# Altium PCB PCB2.PcbDoc
Units mm, origin at the board's own origin, x right, y up, seen from the top; angles counter-clockwise.
Board outline 98 x 98 mm, 2 copper layers (Top Layer, Bottom Layer); 29 components, 27 nets, 109 pads, 5 vias.
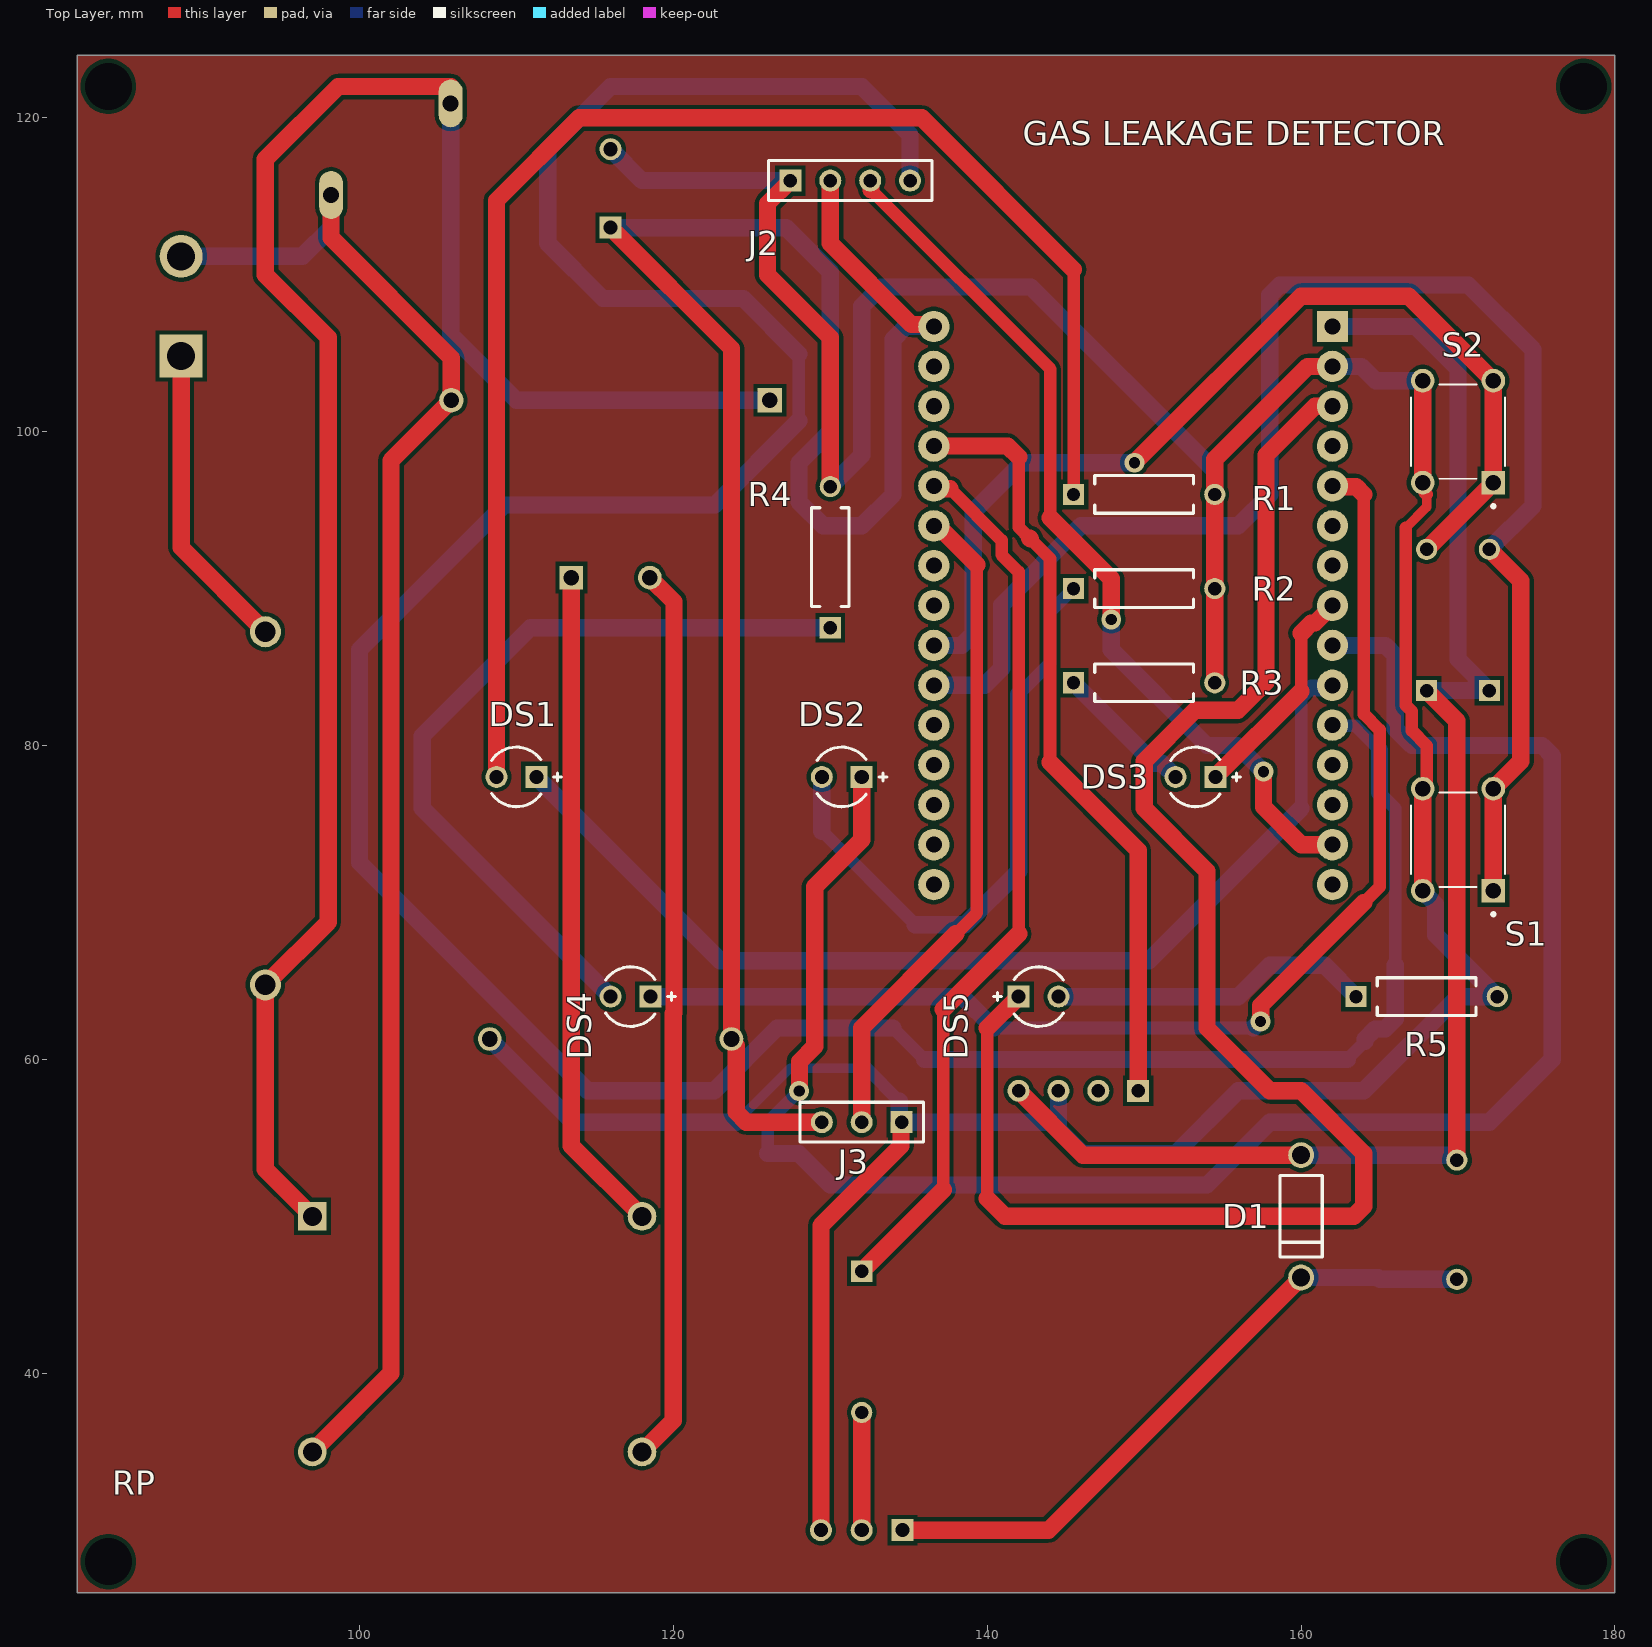
[diagram p0: Top Layer view]
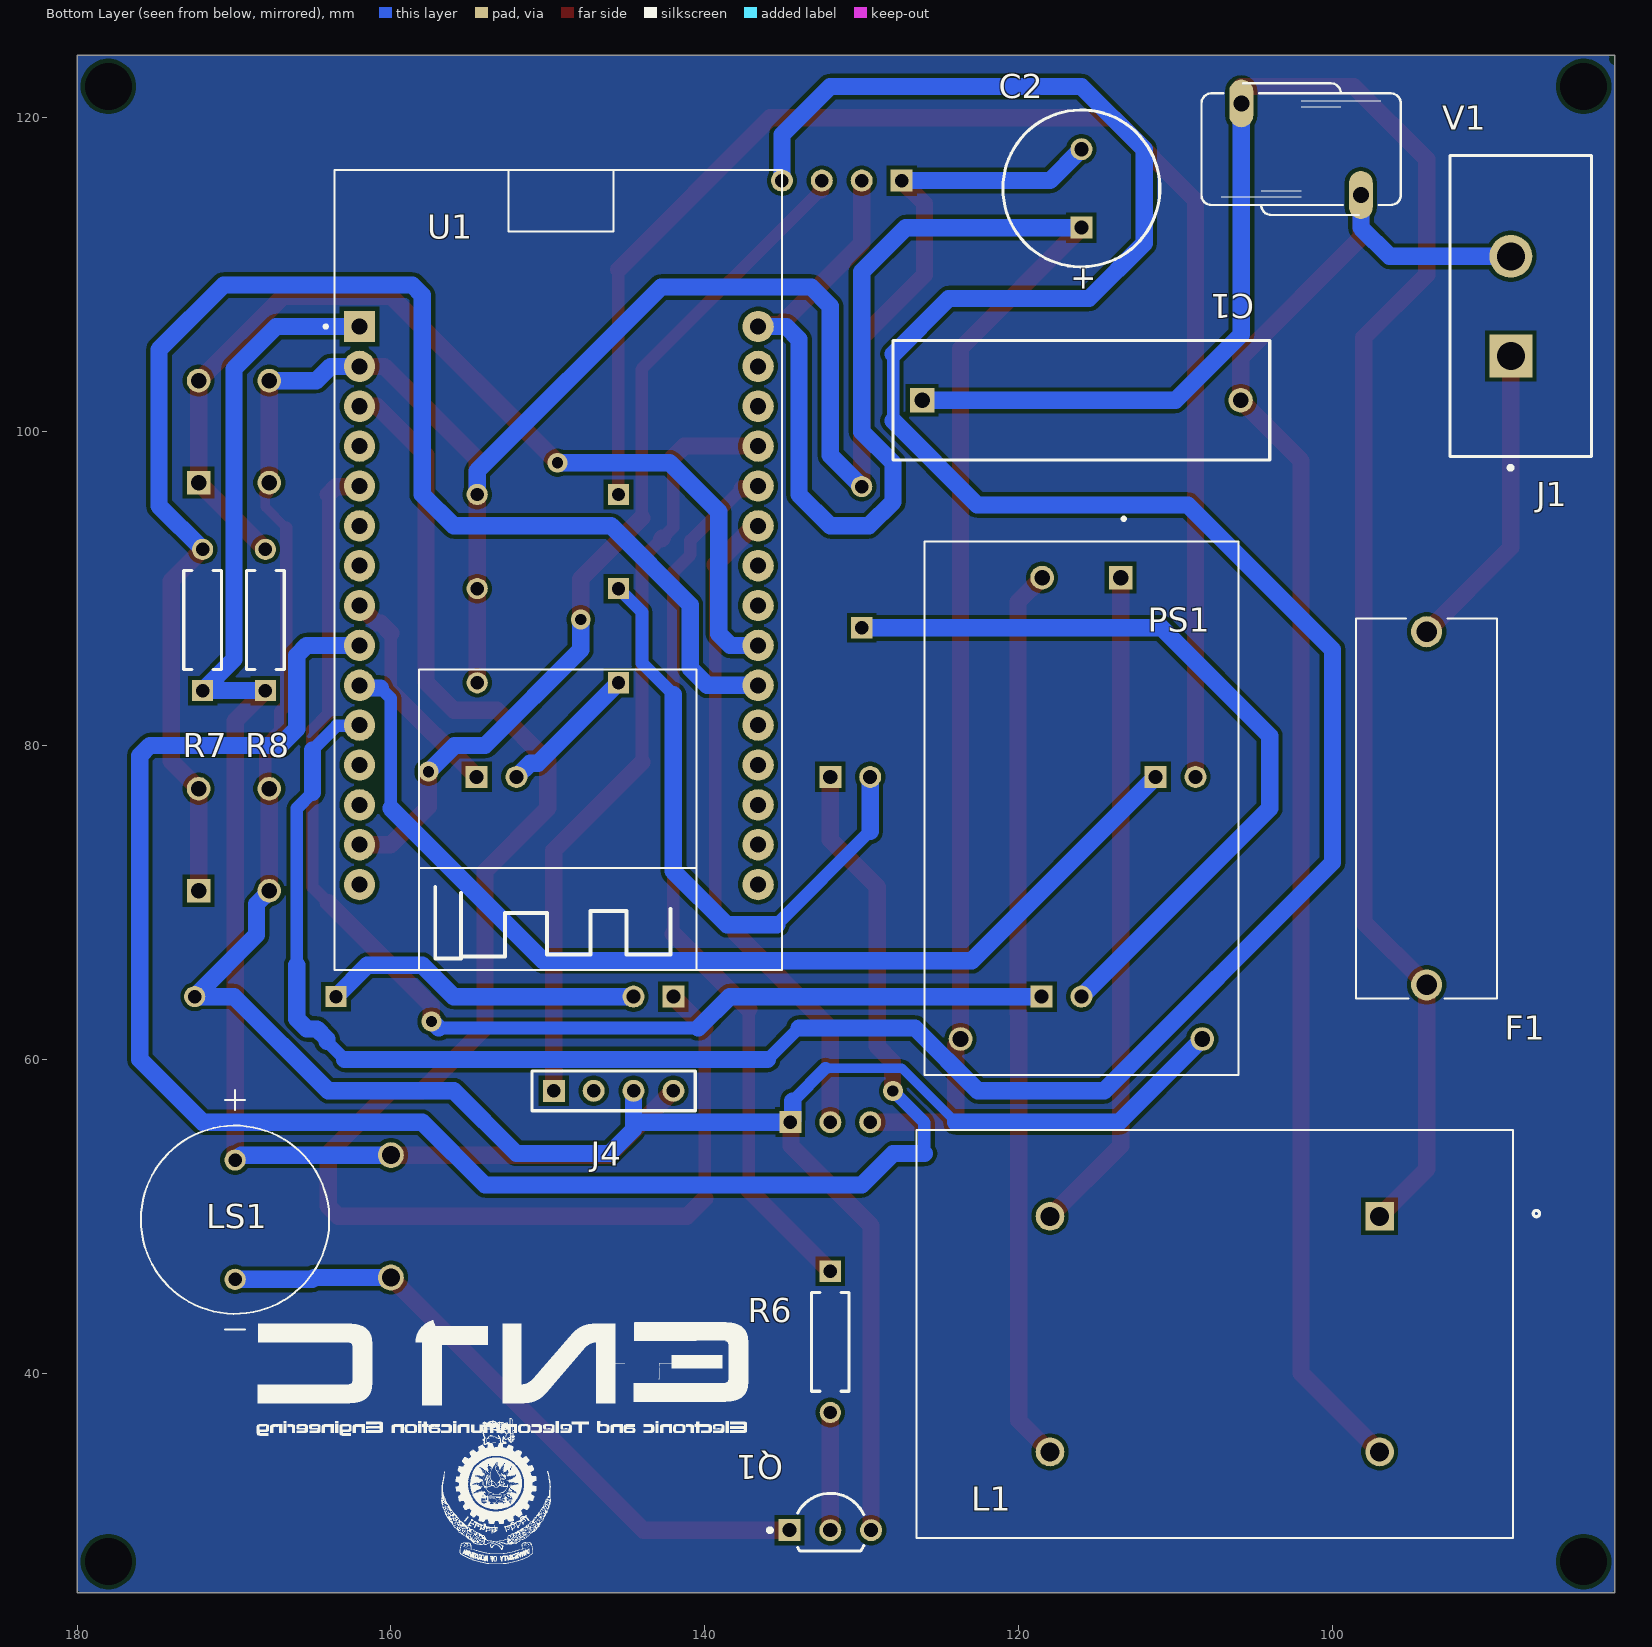
[diagram p1: Bottom Layer view, seen from below]
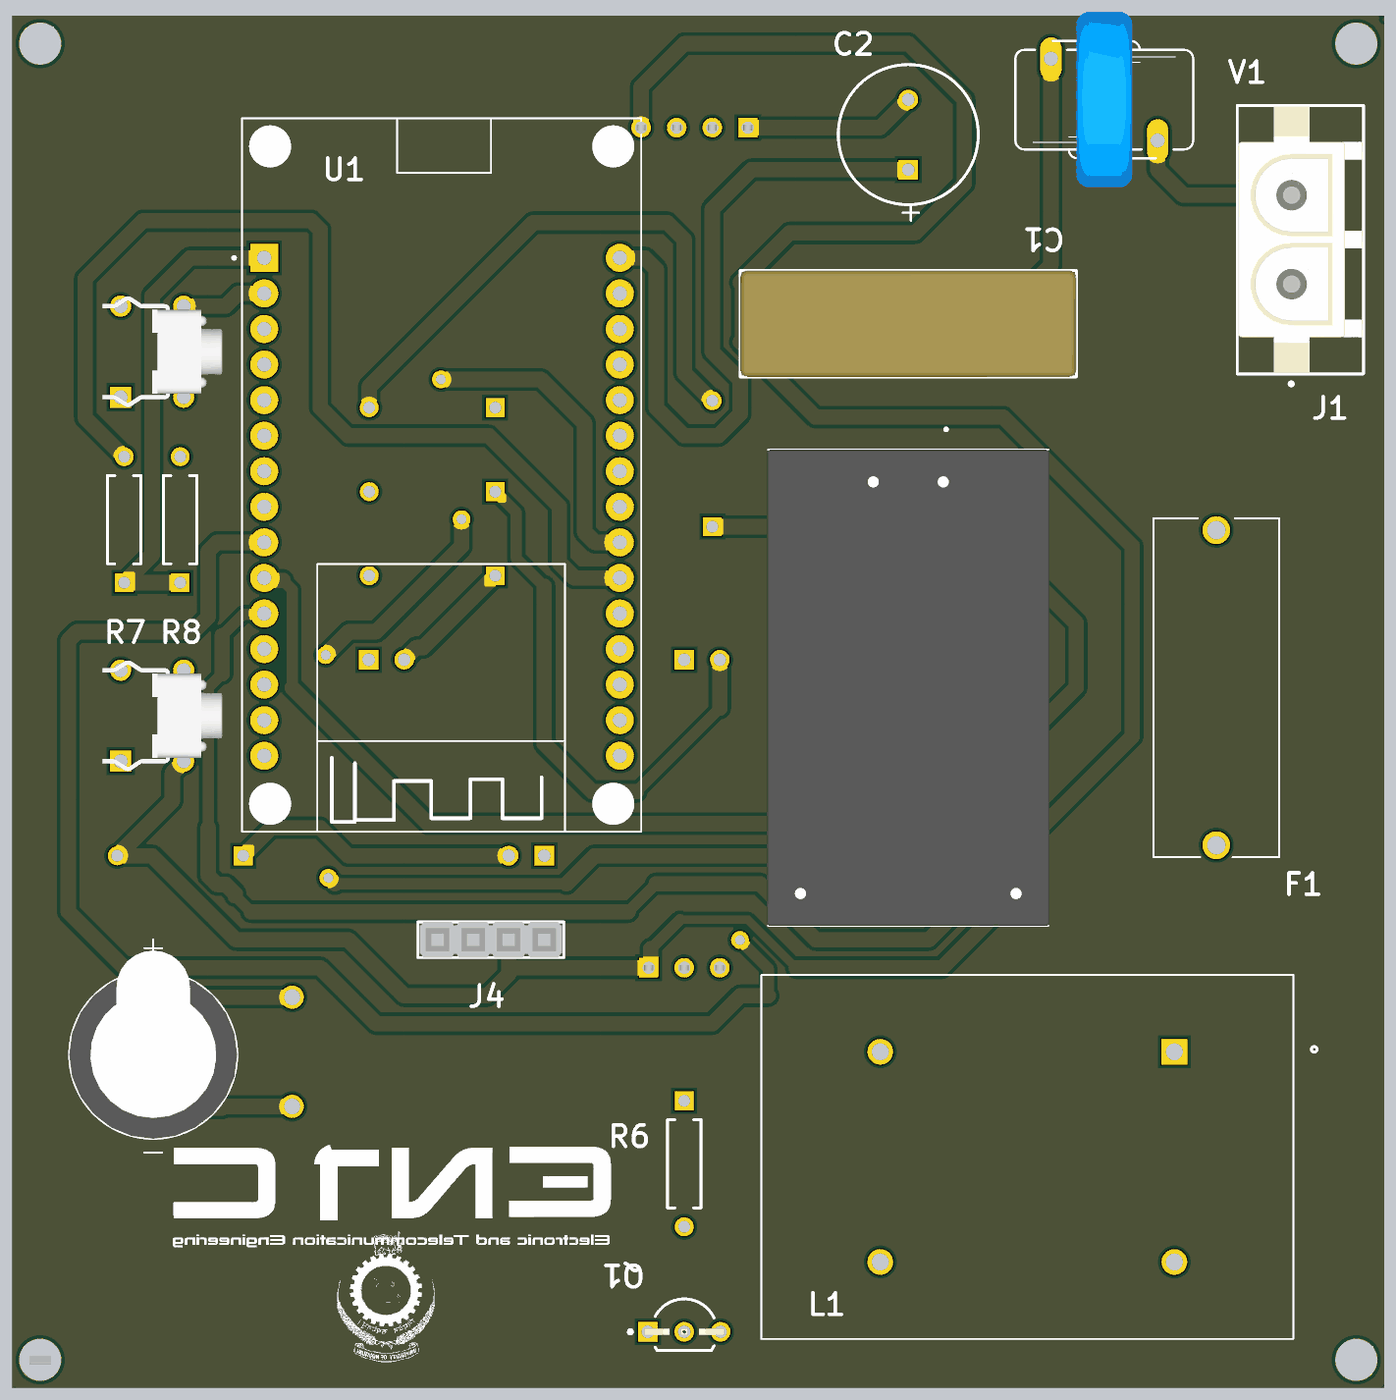
[diagram p2: 3D render of the assembled board from below, using the file's embedded part models]

## Layer stack, top to bottom
Top Solder: solder mask 0.0102, Solder Resist, Dk 3.5
Top Layer: signal copper 0.0356
Dielectric 1: dielectric 0.32, FR-4, Dk 4.8
Bottom Layer: signal copper 0.0356
Bottom Solder: solder mask 0.0102, Solder Resist, Dk 3.5

## Board outline
82,26 180,26 180,124 82,124

## Design rules (kind name [scope] priority, off if disabled: settings)
Clearance [All] p1: gap=0.254 ignorepadtopadclearanceinfootprint=FALSE except(0: Arc-Hole Track-Hole SMDPad-Hole THPad-Hole Via-Hole Fill-Hole Poly-Hole Region-Hole Text-Hole)
PolygonConnect [All] p1: connectstyle=Relief reliefconductorwidth=0.254 reliefentries=4 polygonreliefangle="90 Angle" airgapwidth=0.254
RoutingVias [All] p1: holewidth=0.711 width=1.27 viastyle="Through Hole" minholewidth=0.711 minwidth=1.27 maxholewidth=0.711 maxwidth=1.27
SolderMaskExpansion [All] p1: expansion=0.102 istentingtop=FALSE
Width [All] p1: maxlimit=1.3 minlimit=0.8 preferedwidth=1.1 minimp=50.000000 maximp=50.000000 favimp=50.000000
30 further rules are at their usual default settings.

## Classes and differential pairs
component class Sheet1: C1 C2 D1 DS1 DS2 DS3 DS4 DS5 F1 J4 L1 LS1 PS1 Q1 R1 R2 R3 R4 R5 R6 R7 R8 S1 S2 U1 V1

## Components (designator, comment, footprint, x,y, rotation, side; value= is the part's Value field where it differs from the comment)
C1 "0.1µF/275V" FP-PMR209MC6100M100R30-MFG 116,102 r180 bottom
C2 "ECA-1HM221" CAPPR65-500-1250X1000X1350 116,115.5 r90 bottom value=220µF
D1 "1N4001" FAIR-DO-41-2 160,50 r270 top
DS1 "LTL-1CHE_G" INDPR60-254-520X380X650 110,78 r180 top
DS2 "LTL-1CHE_Y" INDPR60-254-520X380X650 130.73,78 r180 top
DS3 "LTL-1CHE_R" INDPR60-254-520X380X650 153.27,78 r180 top
DS4 "LTL-1CHE_B" INDPR60-254-520X380X650 117.27,64 r180 top
DS5 "LTL-1CHE_B" INDPR60-254-520X380X650 143.27,64 r0 top
F1 "500mA" FUSE_4628 94,76 r270 bottom
J1 "350428-1" FP-350428-1-MFG 88,108 r90 bottom
J2 "OLED display" SMTC-SLW-104-01-X-S 127.46,116 r0 top
J3 "Header 3 pin" SMTC-SLW-103-01-X-S 134.54,56 r180 top
J4 "MQ-6 GAS sensor input" SMTC-SLW-104-01-X-S 149.62,58 r180 bottom
L1 "ET3542-055" IND_ET3542-055 107.497,42.494 r180 bottom
LS1 "AI-1223-TWT-5V-R" XDCR_AI-1223-TWT-5V-R 169.926,49.784 r180 bottom
PS1 "HLK-PM01" CONV_HLK-PM01 116,76 r270 bottom
Q1 "BC547" ONSC-TO-92-3-29-11_AM_BL 132,30 r180 bottom
R1 "MFR-25FBF52-1K" RESA60-630X240 150,96 r0 top value=100Ω
R2 "MFR-25FBF52-1K" RESA60-630X240 150,90 r0 top value=100Ω
R3 "MFR-25FBF52-1K" RESA60-630X240 150,84 r0 top value=100Ω
R4 "MFR-25FBF52-1K" RESA60-630X240 130,92 r90 top value=100Ω
R5 "MFR-25FBF52-1K" RESA60-630X240 168,64 r0 top value=100Ω
R6 "MFR-25FBF52-1K" RESA60-630X240 132,42 r270 bottom value=220Ω
R7 "MFR-25FBF52-1K" RESA60-630X240 172,88 r90 bottom value=5kΩ
R8 "MFR-25FBF52-1K" RESA60-630X240 168,88 r90 bottom value=5kΩ
S1 "TL1105AF160Q" SW_TL1105AF160Q 170,74 r90 top
S2 "TL1105AF160Q" SW_TL1105AF160Q 170,100 r90 top
U1 "ESP32-DEVKIT-V1" MODULE_ESP32_DEVKIT_V1 149.3,91.185 r180 bottom
V1 "MOV-10D561K" MOV-10D561 102,118 r270 bottom

## Footprints (in the part's own frame and the unit in brackets; to place one, negate y for a bottom-side part, rotate by r counter-clockwise, add the part's x,y. Pads: shape width x height; smd on the part's side, far side on the other; paste and mask are expansions set on the pad)
CAPPR65-500-1250X1000X1350 [mm] "THD, 2-Leads, Dia 10mm, Body Length 12.5mm"
  rect 1.4x1.4 hole 0.9: 1(-2.5,0)
  round 1.4 hole 0.9: 2(2.5,0)
  silkscreen extent -5,-5 5,5, body extent -5,-5 4.95,5, height 13.5
CONV_HLK-PM01 [mm]
  rect 1.508x1.508 / inner round 1.508 / far side rect 1.508x1.508 hole 1: 1(-14.7,2.5)
  round 1.508 hole 1: 2(-14.7,-2.5) 3(14.7,7.7) 4(14.7,-7.7)
  silkscreen extent -18.55,-10 17,10, body extent -17,-10.1 17,10.1, height 15
FAIR-DO-41-2 [mm] "THD, 2-Leads, Body 5.2x2.72mm, Pin Spacing 7.8mm"
  round 1.65 hole 1.15: 1(-3.9,0) 2(3.9,0)
  silkscreen extent -2.6,-1.35 2.6,1.35, body extent -4.29,-1.17 4.29,1.17, height 2.35
FP-350428-1-MFG [mm]
  rect 2.73x2.73 hole 1.78 paste-1000 mask+0: 1(-3.175,0.635)
  round 2.73 hole 1.78 paste-1000 mask+0: 2(3.175,0.635)
  silkscreen extent -10.42,-4.51 9.59,4.51, body extent -9.53,-4.46 9.53,4.43, height 15.08
FP-PMR209MC6100M100R30-MFG [mm]
  rect 1.55x1.55 hole 1 paste-1000 mask+0: 1(-10.15,0)
  round 1.55 hole 1 paste-1000 mask+0: 2(10.15,0)
  silkscreen extent -12,-3.8 12,3.8, body extent -12,-3.8 12,3.8, height 14
FUSE_4628 [mm]
  round 1.98 hole 1.32: 1(-11.25,0) 2(11.25,0)
  silkscreen extent -12.1,-4.5 12.1,4.5
IND_ET3542-055 [mil]
  rect 72x72 hole 48: 1(413.5,295.5)
  round 72 hole 48: 2(413.5,-295.5) 3(-413.5,-295.5) 4(-413.5,295.5)
  silkscreen extent -748,-512 815,512
INDPR60-254-520X380X650 [mm] "THD, 2-Leads, Dia 3.8mm, Pitch 2.54mm"
  rect 1.4x1.4 hole 0.9: 1(-1.27,0)
  round 1.4 hole 0.9: 2(1.27,0)
  silkscreen extent -2.87,-1.9 1.58,1.9, body extent -1.9,-1.9 1.9,1.9, height 6.5
MODULE_ESP32_DEVKIT_V1 [mm]
  rect 2x2 / inner round 2 / far side rect 2x2 hole 1.02: 1(-12.7,15.515)
  round 2 hole 1.02: 2(-12.7,12.975) 3(-12.7,10.435) 4(-12.7,7.895) 5(-12.7,5.355) 6(-12.7,2.815) 7(-12.7,0.275) 8(-12.7,-2.265) 9(-12.7,-4.805) 10(-12.7,-7.345) 11(-12.7,-9.885) 12(-12.7,-12.425) 13(-12.7,-14.965) 14(-12.7,-17.505) 15(-12.7,-20.045) 16(12.7,-20.045) 17(12.7,-17.505) 18(12.7,-14.965) 19(12.7,-12.425) 20(12.7,-9.885) 21(12.7,-7.345) 22(12.7,-4.805) 23(12.7,-2.265) 24(12.7,0.275) 25(12.7,2.815) 26(12.7,5.355) 27(12.7,7.895) 28(12.7,10.435) 29(12.7,12.975) 30(12.7,15.515)
  round 3 on Bottom Overlay: ""(-12.28,-23.475) ""(-12.28,23.475) ""(12.23,-23.475) ""(12.23,23.475)
  silkscreen extent -14.95,-25.47 14.23,25.48
MOV-10D561 [mil]
  oval 120x60 hole 40: 1(-115,-150) 2(115,150)
  silkscreen extent -165,-250 165,250, body extent -246,-79 246,79, height 610
ONSC-TO-92-3-29-11_AM_BL [mm] "TO, 3-Leads, Body Dia 4.7mm, Pitch 2.6mm"
  rect 1.4x1.4 hole 0.9: 1(-2.6,0)
  round 1.4 hole 0.9: 2(0,0) 3(2.6,0)
  silkscreen extent -3.98,-1.34 2.13,2.35, body extent -2.84,-1.34 2.84,2.35, height 5.33
RESA60-630X240 [mm] "Axial Resistor, 2-Leads, Dia 2.4mm, Body Length 6.3mm"
  rect 1.35x1.35 hole 0.85: 1(-4.5,0)
  round 1.35 hole 0.85: 2(4.5,0)
  silkscreen extent -3.15,-1.2 3.15,1.2, body extent -4.77,-1.19 4.77,1.2, height 2.4
SMTC-SLW-103-01-X-S [mm] "Low Profile Socket Strip, 1x3 Pins, Vertical, 2.54mm Pitch, Female"
  rect 1.4x1.4 hole 0.86: 1(0,0)
  round 1.4 hole 0.86: 2(2.54,0) 3(5.08,0)
  silkscreen extent -1.4,-1.27 6.48,1.27, body extent -1.27,-1.27 6.35,1.27, height 4.57
SMTC-SLW-104-01-X-S [mm] "Low Profile Socket Strip, 1x4 Pins, Vertical, 2.54mm Pitch, Female"
  rect 1.4x1.4 hole 0.86: 1(0,0)
  round 1.4 hole 0.86: 2(2.54,0) 3(5.08,0) 4(7.62,0)
  silkscreen extent -1.4,-1.27 9.02,1.27, body extent -1.27,-1.27 8.89,1.27, height 4.57
SW_TL1105AF160Q [mm]
  rect 1.508x1.508 / inner round 1.508 / far side rect 1.508x1.508 hole 1: 1(-3.25,-2.25)
  round 1.508 hole 1: 2(3.25,-2.25) 3(-3.25,2.25) 4(3.25,2.25)
  silkscreen extent -4.85,-3 3,3, body extent -3.95,-3 3.95,3, height 5
XDCR_AI-1223-TWT-5V-R [mm]
  round 1.358 hole 0.85: N(0,-3.8) P(0,3.8)
  silkscreen extent -6,-6.98 6,8.25, body extent -6,-6 6,7.44, height 9.7

## Part data
C1: library part CMP-03022-000018-1, "FILTER RC 100 OHM/0.1UF TH", Capacitance=100nF, Case/Package=Radial, Dielectric Material=Paper, Max Operating Temperature=85°C, Min Operating Temperature=-40°C, Package Quantity=250, Resistance=100R, Resistance Tolerance=30%, Tolerance=20%, Voltage=630V, Voltage Rating=250V, Construction=RADIAL, Depth=7.6mm, Height=14mm, Height - Seated (Max)=0.551inch, Lead Diameter=0.8mm, Lead Pitch=20.3mm, Length=24mm, Mount="Through Hole", Number of Elements=1, Number of Pins=2, Number of Terminals/Pins=2, Packaging=Bulk, Pitch=20.3mm, Radiation Hardening=No, REACH SVHC="No SVHC", RoHS Compliant=Yes, Series=PMR209, Series Resistance=100R, Terminal Pitch=20.3mm, Termination=Radial, Voltage Rating (AC)=250V, Width=7.6mm
C2: library part CMP-001-00028-7, "Aluminum Electrolytic Capacitor, 220 uF, +/- 20%, 50 V, -40 to 85 degC, 2-Pin THD, RoHS, Bulk", Capacitor Type=Electrolytic, Case/Package=Radial, Manufacturer=Panasonic, Max Operating Temperature=85°C, Min Operating Temperature=-40°C, Package Description="2-Pin Radial Lead, Dia 10 mm, Body Length 12.5 mm", Package Quantity=200, Package Reference=CAPPR65-500-1250X1000X1350, Ripple Current=400mA, Tolerance=20%, Voltage Rating=50V, Datasheet URL=http://industrial.panasonic.com/cdbs/www-data/pdf/RDF0000/DMF0000COL68.pdf, Datasheet Version=Mar-16, Diameter=10mm, Lead Pitch=5mm, Manufacturer URL=http://www.panasonic.com/, Mounting Technology=TH, Packaging=Bulk, Pins=2, Ripple Current (AC)=400mA, RoHS Compliant=True
D1: library part CMP-004-00007-2, "General Purpose Rectifier, 1.1 V, 1.0 A, -55 to 175 degC, 2-Pin DO-41, RoHS, Tape and Reel", Case/Package=DO-41-2, Forward Current=1A, Forward Voltage=1.1V, Manufacturer=Fairchild, Max Operating Temperature=175°C, Max Surge Current=30A, Min Operating Temperature=-55°C, Package Description="2-Pin Axial Lead, Dia 2.375 mm, Body Length 4.63 mm", Package Quantity=5000, Package Version="Rev. 2, 09/2008", Peak Reverse Current=5uA, Datasheet URL=https://www.fairchildsemi.com/datasheets/1N/1N4007.pdf, Datasheet Version="Rev. 1.1.0, 11/2014", Elements=1, Manufacturer URL=https://www.fairchildsemi.com/, Mounting Technology=TH, Package Reference=DO-41-2, Package URL=http://www.fairchildsemi.com/dwg/DO/DO41A.pdf, Packaging=TapeandReel, Pins=2, RoHS Compliant=True
DS1 DS2 DS3 DS4 DS5: library part CMP-007-00018-2, "LED Uni-Color Red, 100 mW, 30 mA, -55 to 100 degC, 2-Pin THD, RoHS, Bulk", Case/Package=Radial, Colour=Red, Forward Current=20mA, Forward Voltage=2V, Manufacturer=Lite-On, Max Operating Temperature=100°C, Min Operating Temperature=-55°C, Package Description="2-Pin Through Hole Device, Dia 3.8 mm, Pitch 2.54 mm", Package Quantity=1000, Package Reference=LTL-1CHE, Datasheet URL=https://datasheet.ciiva.com/15117/getdatasheetpartid-187746-15117985.pdf, Datasheet Version=Dec-03, Illumination Colour=Red, Lens Style=Dome, Luminous Intensity=12.6mcd, Manufacturer URL=http://www.us.liteon.com/, Mounting Technology=TH, Nominal Vf=2V, Packaging=Bulk, Pins=2, RoHS Compliant=True, Viewing Angle=60degrees
F1: library part CMP-005-00013-1, "5mm Slim Line Fuse holder", Case/Package=None, Availability="In Stock", Check_prices=https://www.snapeda.com/parts/4628/Keystone/view-part/?ref=eda, Component Type=Standard, Design Item ID=4628, MF=Keystone, MP=4628, Pins=2, Price=None, Purchase-URL=https://pricing.snapeda.com/search/part/4628/?ref=eda, SnapEDA_Link=https://www.snapeda.com/parts/4628/Keystone/view-part/?ref=snap, Source=4628.SchLib
J1: library part CMP-03369-000080-1, "CONN HEADER VERT 2POS 6.35MM", Current Rating=12A, Manufacturer="TE Connectivity", Temperature="-40°C to +105°C", Temperature Range High=+105°C, Temperature Range Low=-40°C, Voltage Rating=600V, Automotive=No, Category=Conn, ComponentLink2Description=Datasheet, ComponentLink2URL=https://www.te.com/commerce/DocumentDelivery/DDEController?Action=showdoc&DocId=Customer+Drawing%7F350428%7FY2%7Fpdf%7FEnglish%7FENG_CD_350428_Y2.pdf%7F350428-1, Conn Gender=Male, Conn Orientation=Vertical, Contact Material=Gold,Nickel, Device Class L1=Connectors, Device Class L2="Headers and Wire Housings", Device Class L3=unset, Digikey Description="CONN HEADER VERT 2POS 6.35MM", Height=14.99mm, Lead Free=Yes, Manufacturer Part Number=350428-1, Mouser Description="Connector, Soft Shell; Universal MATE-N-LOK; 2; Nylon; Natural; 19 A; 600 VAC", Number Of Contacts=2, Number Of Rows=1, Octopart=https://octopart.com/350428-1-te+connectivity-46505355, Package=350428-1, Pitch=6.35mm, RoHS=TRUE, Standoff Height=0.63mm
J2 J4: library part CMP-1023-00130-1, "Low Profile Socket Strips, Through-hole, Vertical, -55 to 125 degC, 2.54 mm Pitch, 4-Pin, Female, RoHS", Manufacturer=Samtec, PartNumber=SLW-104-01-G-S, Temperature Range="-55 to 125 degC", ComponentLink1Description="Manufacturer URL", ComponentLink1URL=http://www.samtec.com, ComponentLink2Description=Datasheet, ComponentLink2URL=http://www.samtec.com/documents/webfiles/pdf/SLW.PDF, ComponentLink3Description="Package Specification", ComponentLink3URL=http://www.samtec.com/documents/webfiles/cpdf/SLW-1XX-01-X-X-MKT.pdf, DatasheetVersion=F-214, Mounting Technology=Through-hole, Orientation=Vertical, PackageDescription="Low Profile Socket Strip", PackageReference=SLW-104-01-X-S, PackageVersion="X, 9/1987", Pitch="2.54 mm", RoHS=True
J3: library part CMP-1023-00128-1, "Low Profile Socket Strips, Through-hole, Vertical, -55 to 125 degC, 2.54 mm Pitch, 3-Pin, Female, RoHS", Manufacturer=Samtec, PartNumber=SLW-103-01-G-S, Temperature Range="-55 to 125 degC", ComponentLink1Description="Manufacturer URL", ComponentLink1URL=http://www.samtec.com, ComponentLink2Description=Datasheet, ComponentLink2URL=http://www.samtec.com/documents/webfiles/pdf/SLW.PDF, ComponentLink3Description="Package Specification", ComponentLink3URL=http://www.samtec.com/documents/webfiles/cpdf/SLW-1XX-01-X-X-MKT.pdf, DatasheetVersion=F-214, Mounting Technology=Through-hole, Orientation=Vertical, PackageDescription="Low Profile Socket Strip", PackageReference=SLW-103-01-X-S, PackageVersion="X, 9/1987", Pitch="2.54 mm", RoHS=True
L1: library part CMP-017-000000-1, "COMMON MODE CHOKE 10.0mH@2.7Arms", Package="Vertical-4 Triad Magnetics", Availability=Unavailable, Component Type=Standard, Design Item ID=ET3542-055, MF="Triad Magnetics", MP=ET3542-055, Pin Count=4, Price=None, SnapEDA_Link=https://www.snapeda.com/parts/ET3542-055/Triad%20Magnetics/view-part/1583149/?ref=snap, Source=SnapEDAsch.SchLib
LS1: "ELECTRO MECHANICAL AUDIO INDICATOR", Package="2225 PUI Audio", Availability="In Stock", Check_prices=https://www.snapeda.com/parts/AI-1223-TWT-5V-R/PUI+Audio%252C+Inc./view-part/?ref=eda, MF="PUI Audio,", MP=AI-1223-TWT-5V-R, Price=None, Purchase-URL=https://pricing.snapeda.com/search/part/AI-1223-TWT-5V-R/?ref=eda, SnapEDA_Link=https://www.snapeda.com/parts/AI-1223-TWT-5V-R/PUI+Audio%252C+Inc./view-part/?ref=snap
PS1: library part CMP-009-000000-1, "The HLK-PM01 is a small size low cost AC to DC converter which can take in 110V/220V AC at 50/60 Hz and give 5V 3W output. The module is can be used in designs which run on 5V and needs to be powered form the AC mains.", Package=None, Availability="Not in stock", Check_prices=https://www.snapeda.com/parts/hlk-pm01/Hi-link/view-part/?ref=eda, Component Type=Standard, Design Item ID=HLK-PM01, MF=Hi-link, MP=hlk-pm01, Pin Count=4, Price=None, SnapEDA_Link=https://www.snapeda.com/parts/hlk-pm01/Hi-link/view-part/?ref=snap, Source=HLK-PM01.SchLib
Q1: library part CMP-1048-01605-1, "Amplifier Transistor, NPN Silicon, 3-Pin TO-92, Pb-Free, Tape and Reel", Manufacturer="On Semiconductor", PartNumber=BC547BRL1G, ComponentLink1Description="Manufacturer URL", ComponentLink1URL=http://www.onsemi.com/, ComponentLink2Description=Datasheet, ComponentLink2URL=http://www.onsemi.com/pub_link/Collateral/BC546-D.PDF, ComponentLink3Description="Package Specification", ComponentLink3URL=http://www.onsemi.com/pub_link/Collateral/MAC97-D.PDF, DatasheetVersion="Rev. 7", fT Min (MHz)=150, IC Continuous (A)=0.1, Mounting Technology="Through Hole", PackageDescription="3-Pin Transistor Outline, Body 4.825 x 3.685 mm, Pitch 1.27 mm", PackageReference=TO-92-3-29-11_AM_BL, PackageVersion="Rev. AM", Packing="Tape and Reel", Polarity=NPN, RoHS=TRUE
R1 R2 R3 R4 R5 R6 R7 R8: library part CMP-009-00048-4, "Axial Resistor, 1 KOhm, +/- 1%, 250 mW, -55 to 155 degC, 2-Pin THD, RoHS, Bulk", Case/Package=Axial, Manufacturer=Yageo, Max Operating Temperature=155°C, Min Operating Temperature=-55°C, Package Description="2-Pin Axial Lead, Dia 2.4 mm, Body Length 6.3 mm", Package Quantity=200, Package Reference=MFR-25, Power=250mW, Tolerance=1%, Voltage Rating=250V, Composition=CarbonFilm, Datasheet URL=http://www.yageo.com/documents/recent/Yageo%20LR_MFR_2013.pdf, Datasheet Version=Apr-13, Manufacturer URL=http://www.yageo.com/, Mounting Technology=TH, Packaging=Bulk, RoHS Compliant=True
S1 S2: library part CMP-007-000000-1, Package=None, Availability=Unavailable, Component Type=Standard, Design Item ID=TL1105AF160Q, MP=TL1105AF160Q, Pin Count=4, Price=None, Source=TL1105AF160Q.SchLib
U1: "Dual core, Wi-Fi: 2.4 GHz up to 150 Mbits/s,BLE (Bluetooth Low Energy) and legacy Bluetooth, 32 bits, Up to 240 MHz", Package=None, Availability="Not in stock", Check_prices=https://www.snapeda.com/parts/ESP32-DEVKIT-V1/Do+it/view-part/?ref=eda, MF="Do it", MP=ESP32-DEVKIT-V1, Price=None, SnapEDA_Link=https://www.snapeda.com/parts/ESP32-DEVKIT-V1/Do+it/view-part/?ref=snap
V1: library part CMP-013-000000-1, "560 V 2.5 kA Varistor 1 Circuit Through Hole Disc 10mm", Package="Disc-10 Bourns", Availability="In Stock", Check_prices=https://www.snapeda.com/parts/MOV-10D561K/Bourns/view-part/?ref=eda, Component Type=Standard, Design Item ID=MOV-10D561K, MF=Bourns, MP=MOV-10D561K, Pin Count=2, Price=None, Purchase-URL=https://pricing.snapeda.com/search/part/MOV-10D561K/?ref=eda, SnapEDA_Link=https://www.snapeda.com/parts/MOV-10D561K/Bourns/view-part/?ref=snap, Source=MOV-10D561K.SchLib

## Free pads (board coordinates)
  oval 1.55x0.6 hole 3: 2(84,28) 2(84,122) 2(178,28) 2(178,122)
  rect 1.55x0.6 smd: 5(178,28)

## Via types
v1: diameter 1.27, hole 0.711, Top Layer to Bottom Layer, 5 vias

## Nets (pads, with @x,y where several pads share a name; then routed paths per layer and width w, separated by ;. In a path a pad name is that pad's centre, name@x,y a point inside that pad or via, vN(x,y) a via of type N, cw(c..) or ccw(c..) an arc to the next point about the centre after c; other vN are vias at no path point)
3.3V: D1.1 J4.4 LS1.P R7.1 R8.1 U1.1 | length 94.9
  Top Layer w1.1: J4.4 146.1,53.9 D1.1 ; R8.1 169.926,81.574 LS1.P
  Bottom Layer w1.1: D1.1 169.54,53.9 169.856,53.584 LS1.P ; U1.1 167.3,106.7 170,104 170,85.5 R7.1 R8.1
5V: C2.1 J2.2 J3.3 PS1.4 U1.30 | length 129.1
  Top Layer w1.1: C2.1 123.7,105.3 123.7,61.19 124,60.89 124,56.644 124.644,56 J3.3 ; J2.2 130,112 135.176,106.824 136.476,106.824 U1.30
  Bottom Layer w1.1: C2.1 127.194,113 130,110.194 130,100 128,98 128,95.54 129.54,94 132,94 134,96 134,105.896 134.804,106.7 U1.30
BUZZER: R6.1 U1.26 | length 56.9
  Top Layer w0.8: 137.189,51.689 137.189,63.189 ; 137.632,96.368 140.92,93.08 140.92,92.148 142,91.067 142,68
  Top Layer w1.1: R6.1 137.189,51.689 ; U1.26 136.772,96.368 137.632,96.368 ; 137.189,63.189 142,68
G_LED: DS1.1 U1.10 | length 67
  Bottom Layer w0.8: 160,76 160,83.004 160.664,83.668
  Bottom Layer w1.1: DS1.1 122.984,66.286 150.286,66.286 160,76 ; 160.664,83.668 161.828,83.668 U1.10
GND: C2.2 J2.1 J3.1 J4.3 PS1.3 Q1.3 R1.2 R2.2 R3.2 R4.2 R5.2 S1.3 S1.4 S2.3 S2.4 U1.2 | length 253.9
  Top Layer w0.6: 166.671,93.864 168,95.193 168,95.999
  Top Layer w0.8: 166.671,93.864 166.671,82.554 167.054,82.171 167.054,80.946 168,80 168,77.692 167.75,77.442 S1.4 ; S2.3 167.886,96.615 167.886,96.114 168,95.999
  Top Layer w1.1: J2.1 126,114.54 126,110 130,106 R4.2 ; Q1.3 129.4,49.4 134.503,54.503 134.503,55.963 J3.1 ; R3.2 R2.2 R1.2 154.5,98.235 160.425,104.16 U1.2 ; S1.3 S1.4 ; S2.3 S2.4
  Bottom Layer w0.6: 124,56 127.439,59.439 132.307,59.439
  Bottom Layer w0.8: 132.307,59.439 134.39,57.356
  Bottom Layer w1.1: PS1.3 113.6,56 124,56 ; C2.2 118,116 J2.1 ; R4.2 132,98.5 132,108 133.22,109.22 142.78,109.22 154.5,97.5 R1.2 ; 134.39,57.356 134.39,56.15 J3.1 144.54,56 ; J4.3 144.54,55.531 146.071,54 152,54 156,58 164,58 170,64 R5.2 168.561,67.939 168.561,69.902 167.75,70.713 S1.3 ; U1.2 163.84,104.16 164.75,103.25 S2.4
LIVE: F1.1 J1.1 | length 19.8
  Top Layer w1.1: J1.1 88.635,92.615 F1.1
MQ-6: U1.27
MUTE: R7.2 S1.1 S1.2 U1.21 | length 97.4
  Top Layer w1.1: R7.2 174,90.5 174,79 S1.2 S1.1
  Bottom Layer w1.1: U1.21 139.84,83.84 140.927,84.927 140.927,88.959 145.968,94 156,94 158,96 158,108.703 158.644,109.347 170.653,109.347 174.783,105.217 174.783,95.283 R7.2
MUTE_LED: DS5.1 U1.3 | length 103.6
  Top Layer w0.8: 140,51.132 140,62
  Top Layer w1.1: 140,51.132 141.132,50 163.356,50 164,50.644 164,54 160,58 158,58 154,62 154,72 150,76 150,79.007 153.238,82.245 155.981,82.245 157.759,84.023 157.759,98.496 160.884,101.62 U1.3 ; 140,62 DS5.1
NetC1_1: C1.1 F1.2 L1.1 V1.1 | length 123.5
  Top Layer w1.1: L1.1 94,52.994 F1.2 98,68.75 98,106 94,110 94,117.356 98.644,122 105.81,122 V1.1
  Bottom Layer w1.1: V1.1 105.81,106.196 110.006,102 C1.1
NetD1_2: D1.2 LS1.N Q1.1 | length 42
  Top Layer w1.1: Q1.1 143.9,30 D1.2
  Bottom Layer w1.1: D1.2 164.897,46.1 165.013,45.984 LS1.N
NetDS1_2: DS1.2 R1.1 | length 94
  Top Layer w0.8: R1.1 145.5,110.329
  Top Layer w1.1: DS1.2 108.73,114.73 114,120 135.829,120 145.5,110.329
NetDS2_2: DS2.2 R2.1 | length 39.3
  Bottom Layer w0.8: 129.46,74.54 135.42,68.58 ; 142,83.25 144,85.25 144,88.5 R2.1
  Bottom Layer w1.1: 129.46,74.54 DS2.2 ; 135.42,68.58 138.58,68.58 142,72 142,83.25
NetDS3_2: DS3.2 R3.1 | length 9
  Bottom Layer w1.1: R3.1 150.63,78.87 151.13,78.87 DS3.2
NetDS4_2: DS4.2 R4.1 | length 50.4
  Bottom Layer w1.1: DS4.2 104,76 104,80.607 110.893,87.5 R4.1
NetDS5_2: DS5.2 R5.1 | length 20.6
  Bottom Layer w1.1: DS5.2 156,64 158,66 161.5,66 R5.1
NetL1_3: L1.3 PS1.2 | length 57.2
  Top Layer w1.1: L1.3 120,36.989 120,62.923 120.044,62.967 120.044,89.156 PS1.2
NetL1_4: L1.4 PS1.1 | length 42.6
  Top Layer w1.1: PS1.1 113.5,54.5 L1.4
NetQ1_2: Q1.2 R6.2 | length 7.5
  Top Layer w1.1: Q1.2 R6.2
NUTRAL: C1.2 J1.2 L1.2 V1.2 | length 99.3
  Top Layer w1.1: L1.2 102,39.994 102,98.15 C1.2 105.85,104.699 98.19,112.359 V1.2
  Bottom Layer w1.1: J1.2 96.36,111.175 98.19,113.005 V1.2
PIR: J3.2 U1.25 | length 42.3
  Top Layer w0.8: 138,68 139.34,69.34 139.34,91.513
  Top Layer w1.1: J3.2 132,62 138,68 ; U1.25 136.844,94 137.294,93.55 137.303,93.55 139.34,91.513
R_LED: DS3.1 U1.8 | length 14.2
  Top Layer w0.8: 160,83.46 160,87.159
  Top Layer w1.1: DS3.1 160,83.46 ; 160,87.159 160.644,87.804 160.884,87.804 U1.8
SCL: J2.3 U1.14 | length 56.8
  Top Layer w0.8: J2.3@132.597,115.403 144.021,103.979 144.021,94.513
  Top Layer w1.1: J2.3 132.597,115.943 J2.3@132.597,115.403 ; 144.021,94.513 147.904,90.63 v1(147.904,88.036) ; v1(157.607,78.334) 157.607,76.093 160.02,73.68 U1.14
  Bottom Layer w1.1: v1(147.904,88.036) 147.904,86.096 154,80 155.941,80 v1@157.574,78.366
SDA: J2.4 U1.11 | length 202.6
  Bottom Layer w0.8: 128,100.695 128,104.943 ; 134,62 136,60 ; U1.11 162.046,81.254 163.465,81.254 165,79.719 ; 162.933,60 164.074,61.142 ; 165,77 166,76 166,66
  Bottom Layer w1.1: 128,100.695 122.631,95.326 109.22,95.326 100,86.106 100,72.542 114.542,58 122.603,58 126.603,62 134,62 ; 128,104.943 124.46,108.483 115.517,108.483 112,112 112,118 116,122 132,122 135.08,118.92 J2.4 ; 136,60 162.933,60 ; 164.074,61.142 164.074,61.3 164.719,61.944 165.356,61.944 166,62.588 166,66 ; 165,77 165,79.719
TEST: R8.2 S2.1 S2.2 U1.22 | length 64.2
  Top Layer w1.1: v1(149.377,98.019) 159.995,108.636 166.864,108.636 S2.2 S2.1 171.12,95.62 R8.2
  Bottom Layer w1.1: U1.22 138.38,86.38 139.116,87.116 139.116,94.894 142.24,98.019 v1(149.377,98.019)
TEST_LED: DS4.1 U1.5 | length 79.2
  Top Layer w0.8: 164,70 165,71 165,81 164,82 164,96
  Top Layer w1.1: v1(157.414,62.418) 157.431,62.435 157.431,63.431 164,70 ; U1.5 162.044,96.496 163.504,96.496 164,96
  Bottom Layer w0.8: 140.413,62 v1@156.95,62
  Bottom Layer w1.1: DS4.1 138.413,64 140.413,62 ; v1@156.95,62 157.368,62.418 v1(157.414,62.418)
Y_LED: DS2.1 U1.9 | length 119.6
  Top Layer w1.1: v1(128.018,57.982) 128.033,57.997 128.033,59.861 129.007,60.835 129.007,71.007 132,74 DS2.1
  Bottom Layer w0.8: 126,54 126,55.965 v1(128.018,57.982)
  Bottom Layer w1.1: 126,54 128,54 130,52 154,52 158,56 172,56 176,60 176,79.356 175.356,80 167.062,80 166,81.062 166,85.736 165.356,86.38 U1.9
pads on no net: J4.1 J4.2 U1. U1.4 U1.6 U1.7 U1.12 U1.13 U1.15 U1.16 U1.17 U1.18 U1.19 U1.20 U1.23 U1.24 U1.28 U1.29
copper on no net: | length 49.2
  Top Layer w0.8: 142,98.386 142,93.915 142.71,93.205 ; 142.751,93.164 144,91.915 144,78.936
  Top Layer w1.1: 136.6,99.08 141.306,99.08 142,98.386 ; 142.71,93.205 142.751,93.164 ; 144,78.936 149.62,73.316 149.62,58

## Polygon pours and split planes (outlines as drawn)
no net on Bottom Layer "NONET_L02_P001" (solid, pour order 1): 82,124 180,124 180,26 82,26
no net on Top Layer "NONET_L01_P000" (solid, pour order 0): 82,124 180,124 180,26 82,26

## Silkscreen, mask and mechanical layers (free items; w line width, h text height)
Top Overlay:
  text "GAS LEAKAGE DETECTOR" at 142.254,118.254 h1.52
  text "RP" at 84.254,32.254 h1.52
Bottom Overlay:
  drawing of 132 lines, arcs and shapes, not listed

## Dimensions
82,26 to 82,123.746 on Bottom Layer
82,26 to 180,26 on Bottom Layer

## Text inside footprints (layer, text, board x,y; h text height)
C2: Bottom Overlay "+" at 115.238,108.896 h1.5 r270